# Altium PCB PCB.PcbDoc
Units mm, origin at the board's own origin, x right, y up, seen from the top; angles counter-clockwise.
Board outline 26 x 26 mm, 4 copper layers (Top Layer, GND, Power, Bottom Layer), stack 1.586 mm thick; 44 components, 28 nets, 221 pads, 240 vias.
Unrouted connection lines stored in the file: 4.
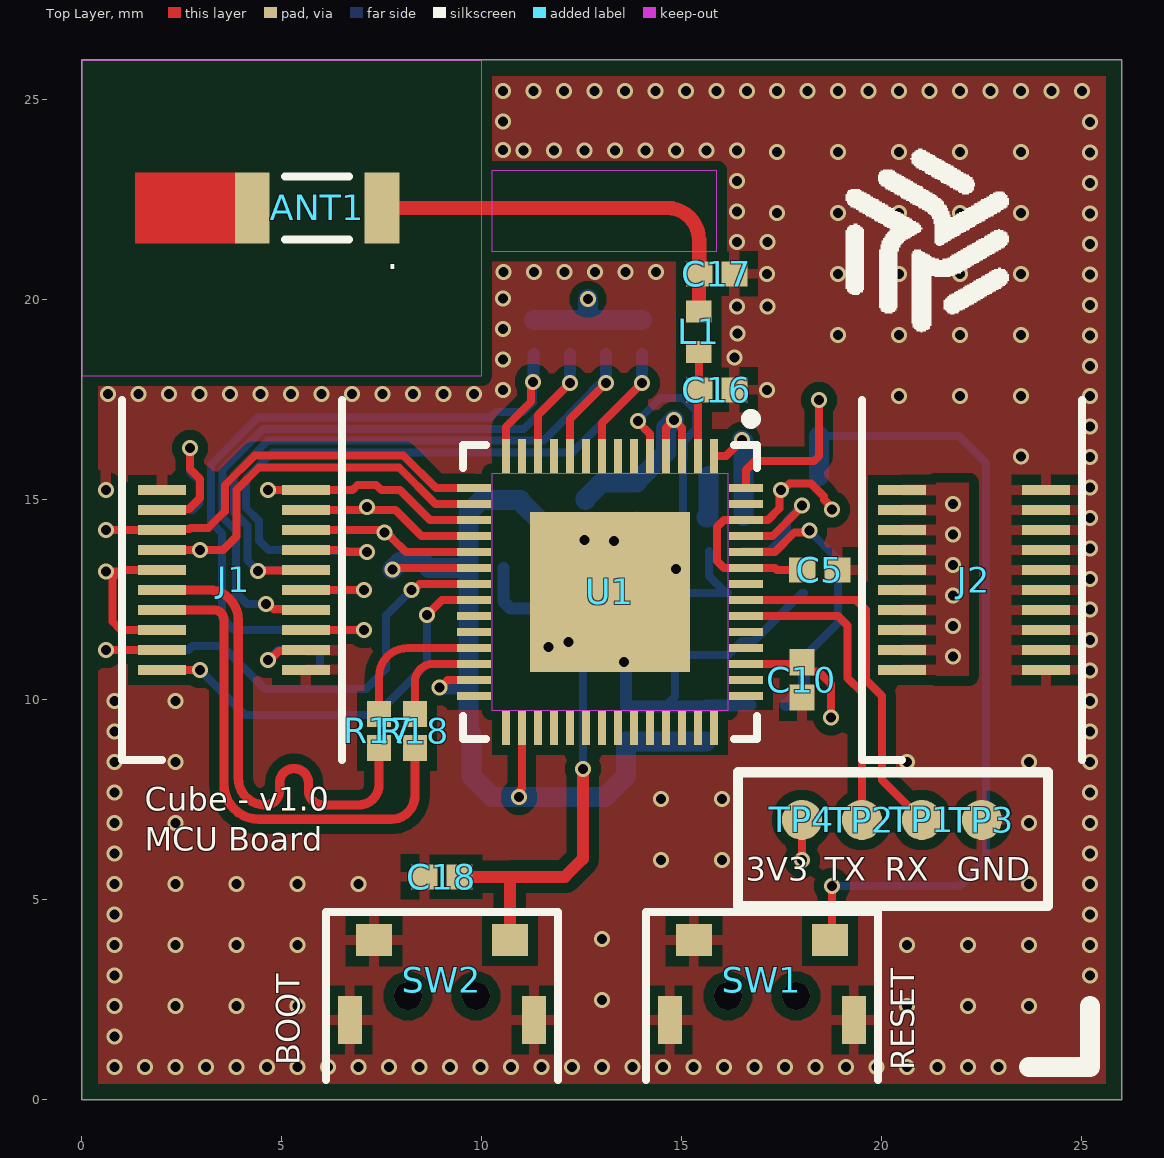
[diagram p0: Top Layer view]
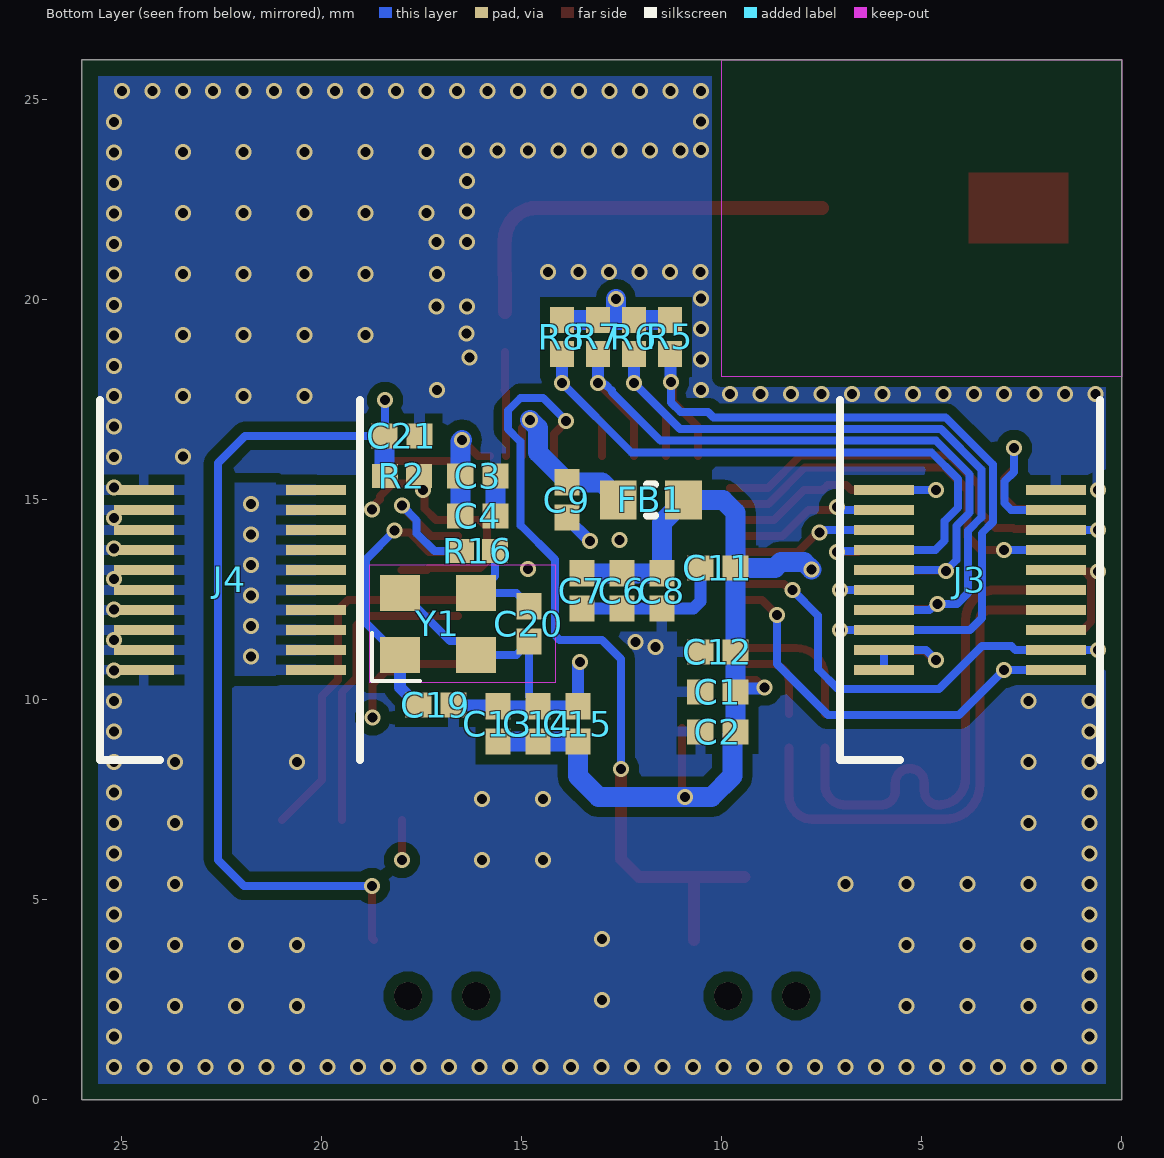
[diagram p1: Bottom Layer view, seen from below]
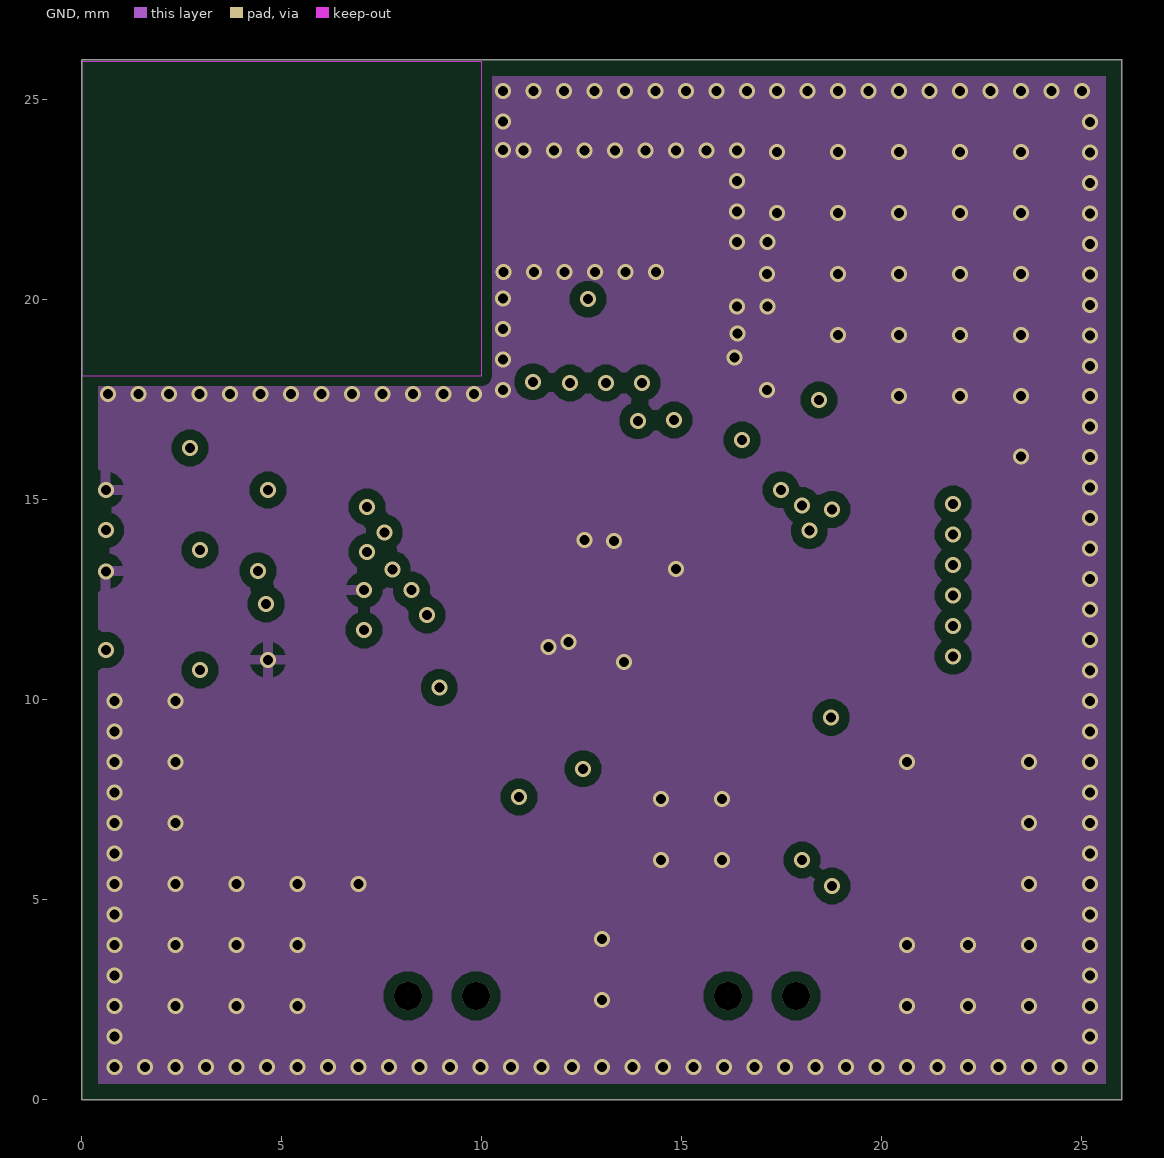
[diagram p2: GND]
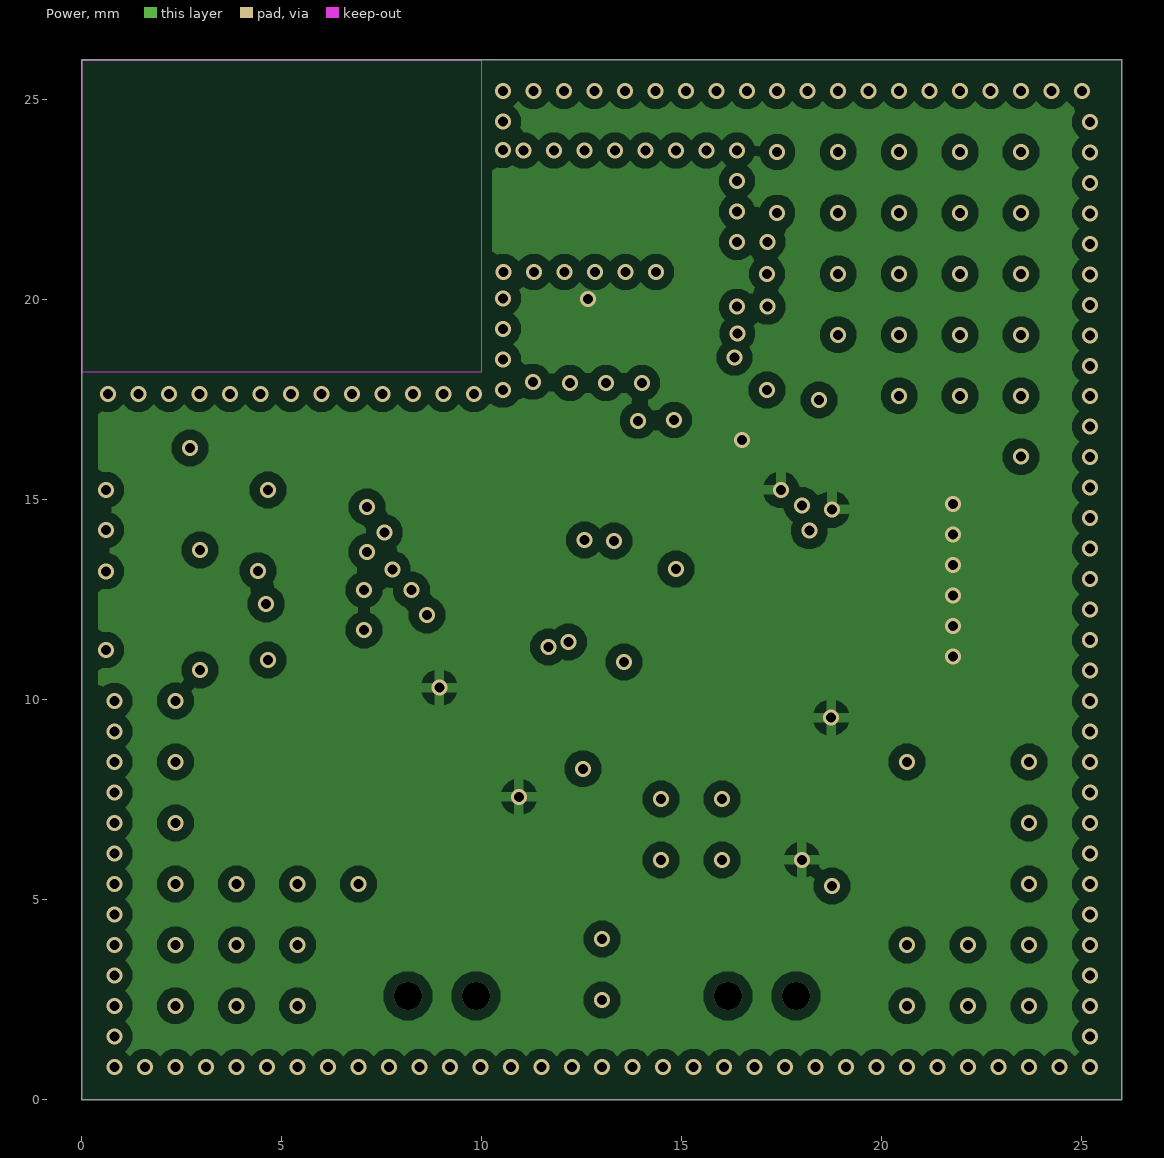
[diagram p3: Power]

## Layer stack, top to bottom
Top Solder: solder mask 0.0102, Solder Resist, Dk 3.5
Top Layer: signal copper 0.035
Dielectric 2: prepreg 0.2104, PP-006, Dk 4.6
GND: signal copper 0.0152
Dielectric 1: core 1.065, Core-025, Dk 4.6
Power: signal copper 0.0152
Dielectric 3: prepreg 0.2104, PP-006, Dk 4.6
Bottom Layer: signal copper 0.035
Bottom Solder: solder mask 0.0102, Solder Resist, Dk 3.5

## Board outline
0,0 0,26 26,26 26,0

## Design rules (kind name [scope] priority, off if disabled: settings)
BoardOutlineClearance [All] p1: gap=0.4 ignorepadtopadclearanceinfootprint=FALSE
Clearance [All] p1: gap=0.254 ignorepadtopadclearanceinfootprint=FALSE except(0: Arc-Hole Track-Hole SMDPad-Hole THPad-Hole Via-Hole Fill-Hole Poly-Hole Region-Hole Text-Hole; 0.09: Arc-Arc Arc-Track Track-Track; 0.127: SMDPad-SMDPad; 0.2: Arc-SMDPad Track-SMDPad; 0.33: Arc-THPad Track-THPad; 0.5: THPad-THPad)
DiffPairsRouting DiffPairsRouting_USB [InDifferentialPairClass('USB')] p1: maxlimit=0.254 minlimit=0.127 mostfreqgap=0.254 toplayer_maxgap=0.127 toplayer_prefgap=0.127 toplayer_minwidth=0.232 toplayer_maxwidth=0.232 toplayer_prefwidth=0.232 bottomlayer_maxgap=0.127 bottomlayer_prefgap=0.127 bottomlayer_minwidth=0.232 bottomlayer_maxwidth=0.232 bottomlayer_prefwidth=0.232 impedanceprofiledriven=TRUE impedanceprofileid={58094A1F-92C8-4BD8-B7AC-1BFEEA8435DD} impedanceprofilevalue=90.000000 maxuncoupledlength=12.7
DiffPairsRouting [All] p2: maxlimit=0.254 minlimit=0.254 mostfreqgap=0.254 toplayer_minwidth=0.381 toplayer_maxwidth=0.381 toplayer_prefwidth=0.381 midlayer1_minwidth=0.381 midlayer1_maxwidth=0.381 midlayer1_prefwidth=0.381 midlayer2_minwidth=0.381 midlayer2_maxwidth=0.381 midlayer2_prefwidth=0.381 bottomlayer_minwidth=0.381 bottomlayer_maxwidth=0.381 bottomlayer_prefwidth=0.381 maxuncoupledlength=12.7
PolygonConnect [All] p1: connectstyle=Relief reliefconductorwidth=0.254 reliefentries=4 polygonreliefangle="90 Angle" airgapwidth=0.254
RoutingVias [All] p1: holewidth=0.711 width=1.27 viastyle="Through Hole" minholewidth=0.2 minwidth=0.4 maxholewidth=0.711 maxwidth=1.27
SolderMaskExpansion [All] p1: expansion=0.102 istentingtop=FALSE
Width Width_50Ohm [InNetClass('50Ohm')] p1: maxlimit=0.356 minlimit=0.262 preferedwidth=0.356 toplayer_minwidth=0.356 midlayer1_maxwidth=0.262 midlayer1_prefwidth=0.262 midlayer2_maxwidth=0.262 midlayer2_prefwidth=0.262 bottomlayer_minwidth=0.356 impedanceprofiledriven=TRUE impedanceprofileid={D433AC5E-C2AE-4E07-8878-89EC5C964F57} impedanceprofilevalue=50.000000 minimp=50.000000 maximp=50.000000 favimp=50.000000
Width [All] p2: maxlimit=2 minlimit=0.09 preferedwidth=0.254 minimp=50.000000 maximp=50.000000 favimp=50.000000
29 further rules are at their usual default settings.

## Classes and differential pairs
net class 50Ohm: LNA_IN_50
component class "03 MCU": ANT1 C1 C2 C3 C4 C5 C6 C7 C8 C9 C10 C11 C12 C13 C14 C15 C16 C17 C18 C19 C20 C21 FB1 L1 R2 R5 R6 R7 R8 R16 R17 R18 SW1 SW2 TP1 TP2 TP3 TP4 U1 Y1
differential pair class USB: CP_USB ESP_USB USB
component class "02 CONNECTION": J1 J2 J3 J4
differential pair ESP_USB: +ESP_USB_P -ESP_USB_N

## Components (designator, comment, footprint, x,y, rotation, side; value= is the part's Value field where it differs from the comment)
ANT1 "ANT3216LL00R2400A" INDC3216X14N 5.88,22.3 r180 top
C1 "100nF/50V" CAPC1005X06N 10.1,10.2 r180 bottom
C2 "1uF/25V" CAPC1005X06N 10.1,9.2 r180 bottom
C3 "100nF/50V" CAPC1005X06N 16.1,15.6 r0 bottom
C4 "100pF/50V" CAPC1005X06N 16.1,14.6 r0 bottom
C5 "1uF/25V" CAPC1005X06N 18.45,13.25 r180 top
C6 "10uF/6.3V" CAPC1005X06N 12.5,12.725 r90 bottom
C7 "1uF/25V" CAPC1005X06N 13.5,12.725 r90 bottom
C8 "100nF/50V" CAPC1005X06N 11.5,12.725 r90 bottom
C9 "100nF/50V" CAPC1005X06N 13.875,15 r90 bottom
C10 "100nF/50V" CAPC1005X06N 18,10.5 r90 top
C11 "100nF/50V" CAPC1005X06N 10.1,13.3 r180 bottom
C12 "100nF/50V" CAPC1005X06N 10.1,11.2 r180 bottom
C13 "10uF/6.3V" CAPC1005X06N 15.6,9.4 r90 bottom
C14 "10uF/6.3V" CAPC1005X06N 14.6,9.4 r90 bottom
C15 "100nF/50V" CAPC1005X06N 13.6,9.4 r270 bottom
C16 "3.3pF/50V" CAPC1005X06N 15.875,17.75 r180 top
C17 "3.3pF/50V" CAPC1005X06N 15.875,20.65 r180 top
C18 "100nF/50V" CAPC1005X06N 9,5.575 r0 top
C19 "27pF/50V" CAPC1005X06N 17.15,9.875 r0 bottom
C20 "27pF/50V" CAPC1005X06N 14.825,11.9 r90 bottom
C21 "100nF/50V" CAPC1005X06N 18,16.6 r0 bottom
FB1 "1.8A" INDC1608X10N 11.775,15 r0 bottom
J1 "0537480208" 0537480208 2,10.75 r90 top locked
J2 "0537480208" 0537480208 20.5,10.75 r90 top locked
J3 "0529910208" 0529910208 5.55,10.75 r90 bottom locked
J4 "0529910208" 0529910208 24.05,10.75 r90 bottom locked
L1 "2.2nH" INDC1005X05N 15.425,19.2 r90 top
R2 "10K/1%" RESC1005X04N 18,15.6 r0 bottom
R5 "4K7/1%" RESC1005X04N 11.3,19.075 r90 bottom
R6 "4K7/1%" RESC1005X04N 12.2,19.075 r90 bottom
R7 "4K7/1%" RESC1005X04N 13.1,19.075 r90 bottom
R8 "4K7/1%" RESC1005X04N 14,19.075 r90 bottom
R16 "22R/1%" RESC1005X04N 16.1,13.725 r180 bottom
R17 "22R/1%" RESC1005X04N 7.425,9.225 r90 top
R18 "22R/1%" RESC1005X04N 8.325,9.225 r90 top
SW1 "PUSH BUTTON SMD" 1TS003B-1400-3500A-CT 17,2.6 r180 top
SW2 "PUSH BUTTON SMD" 1TS003B-1400-3500A-CT 9,2.6 r180 top
TP1 "Test Point 1mm" TEST_POINT_1mm#1 21,6.975 r90 top
TP2 "Test Point 1mm" TEST_POINT_1mm#2 19.5,7 r90 top
TP3 "Test Point 1mm" TEST_POINT_1mm#2 22.5,7 r90 top
TP4 "Test Point 1mm" TEST_POINT_1mm#2 18,7 r90 top
U1 "ESP32-S2FN4R2" QFN40P700X700X90_HS-57N 13.2,12.7 r270 top
Y1 "40MHz" 7E40000E15UCG 16.15,12.675 r0 bottom

## Footprints (in the part's own frame and the unit in brackets; to place one, negate y for a bottom-side part, rotate by r counter-clockwise, add the part's x,y. Pads: shape width x height; smd on the part's side, far side on the other; paste and mask are expansions set on the pad)
1TS003B-1400-3500A-CT [mm] "1TS003B-1400-3500A-CT"
  rect 0.9x0.8 smd: 1(-1.7,-1.4) 2(1.7,-1.4)
  rect 0.6x1.2 smd: 3(-2.3,0.6) 3(2.3,0.6)
  round 0.7 hole 0.7 mask+0.102: None(-0.85,0) None(0.85,0)
  silkscreen extent -2.9,-2.1 2.9,2.1, body extent -2.36,-1.55 2.34,2.1, height 1.91
7E40000E15UCG [mm] "7E40000E15UCG"
  rect 1x0.9 smd: 1(1.9,1.55) 2(0,1.55) 3(0,0) 4(1.9,0)
  silkscreen extent 1.4,1 2.6,2.2, body extent -0.31,-0.25 2.26,1.8, height 0.55
0529910208 [mm]
  rect 0.25x1.5 smd: 1(0,-3.9) 2(0.5,-3.9) 3(1,-3.9) 4(1.5,-3.9) 5(2,-3.9) 6(2.5,-3.9) 7(3,-3.9) 8(3.5,-3.9) 9(4,-3.9) 10(4.5,-3.9) 11(0,0.4) 12(0.5,0.4) 13(1,0.4) 14(1.5,0.4) 15(2,0.4) 16(2.5,0.4) 17(3,0.4) 18(3.5,0.4) 19(4,0.4) 20(4.5,0.4)
  silkscreen extent -2.25,-5 6.75,1.5, body extent -2.15,-4.45 6.65,0.95, height 2.31
0537480208 [mm]
  rect 0.25x1.2 smd: 1(0,0) 2(0.5,0) 3(1,0) 4(1.5,0) 5(2,0) 6(2.5,0) 7(3,0) 8(3.5,0) 9(4,0) 10(4.5,0) 11(0,-3.6) 12(0.5,-3.6) 13(1,-3.6) 14(1.5,-3.6) 15(2,-3.6) 16(2.5,-3.6) 17(3,-3.6) 18(3.5,-3.6) 19(4,-3.6) 20(4.5,-3.6)
  silkscreen extent -2.25,-4.5 6.75,1, body extent -2.15,-3.9 6.65,0.4, height 2.44
CAPC1005X06N [mm] "Chip Capacitor, 2-Leads, Body 1.00x0.50mm, IPC Medium Density"
  rect 0.66x0.62 smd: 1(-0.44,0) 2(0.44,0)
  body extent -0.53,-0.28 0.53,0.27, height 0.55
INDC1005X05N [mm] "Chip Inductor, 2-Leads, Body 1.00x0.50mm, IPC Medium Density"
  rect 0.55x0.64 smd: 1(-0.505,0) 2(0.505,0)
  body extent -0.5,-0.25 0.5,0.25, height 0.5
INDC1608X10N [mm] "Chip Inductor, 2-Leads, Body 1.65x0.80mm, IPC Medium Density"
  rect 0.92x0.98 smd: 1(-0.815,0) 2(0.815,0)
  silkscreen extent -0.1,-0.39 0.1,0.39, body extent -0.9,-0.48 0.9,0.47, height 0.95
INDC3216X14N [mm] "Chip Inductor, 2-Leads, Body 3.20x1.60mm, IPC Medium Density"
  rect 0.87x1.78 smd: 1(-1.62,0) 2(1.62,0)
  Top Layer region: 2.05,-0.89 4.55,-0.89 4.55,0.89 2.05,0.89
  silkscreen extent -0.8,-0.79 0.8,0.79, body extent -1.68,-0.87 1.68,0.87, height 1.45
QFN40P700X700X90_HS-57N [mm] "QFN, 56-Leads, Body 7.00x7.00mm, Pitch 0.40mm, Thermal Pad 4.00x4.00mm, IPC Medium Density"
  rect 0.85x0.2 smd: 1(-3.4,2.6) 2(-3.4,2.2) 3(-3.4,1.8) 4(-3.4,1.4) 5(-3.4,1) 6(-3.4,0.6) 7(-3.4,0.2) 8(-3.4,-0.2) 9(-3.4,-0.6) 10(-3.4,-1) 11(-3.4,-1.4) 12(-3.4,-1.8) 13(-3.4,-2.2) 14(-3.4,-2.6) 29(3.4,-2.6) 30(3.4,-2.2) 31(3.4,-1.8) 32(3.4,-1.4) 33(3.4,-1) 34(3.4,-0.6) 35(3.4,-0.2) 36(3.4,0.2) 37(3.4,0.6) 38(3.4,1) 39(3.4,1.4) 40(3.4,1.8) 41(3.4,2.2) 42(3.4,2.6)
  rect 0.2x0.85 smd: 15(-2.6,-3.4) 16(-2.2,-3.4) 17(-1.8,-3.4) 18(-1.4,-3.4) 19(-1,-3.4) 20(-0.6,-3.4) 21(-0.2,-3.4) 22(0.2,-3.4) 23(0.6,-3.4) 24(1,-3.4) 25(1.4,-3.4) 26(1.8,-3.4) 27(2.2,-3.4) 28(2.6,-3.4) 43(2.6,3.4) 44(2.2,3.4) 45(1.8,3.4) 46(1.4,3.4) 47(1,3.4) 48(0.6,3.4) 49(0.2,3.4) 50(-0.2,3.4) 51(-0.6,3.4) 52(-1,3.4) 53(-1.4,3.4) 54(-1.8,3.4) 55(-2.2,3.4) 56(-2.6,3.4)
  rect 4x4 smd paste-2539.97: 57(0,0)
  silkscreen extent -4.45,-3.67 3.67,3.68, body extent -3.53,-3.52 3.52,3.53, height 0.9
RESC1005X04N [mm] "Chip Resistor, 2-Leads, Body 1.00x0.50mm, IPC Medium Density"
  rect 0.65x0.6 smd: 1(-0.425,0) 2(0.425,0)
  body extent -0.55,-0.3 0.55,0.3, height 0.4
TEST_POINT_1mm#1 [mm]
  round 1 smd: 1(0.025,0)
TEST_POINT_1mm#2 [mm]
  round 1 smd: 1(0,0)

## Part data
ANT1: "1206  Antennas ROHS", manufacturer=YAGEO, assembler_number=C293767, datasheet=https://datasheet.lcsc.com/lcsc/1810241140_YAGEO-ANT3216LL00R2400A_C293767.pdf, mfr_part_number=ANT3216LL00R2400A
C1 C3 C8 C9 C10 C11 C12 C15 C18 C21: library part CL05B104KO5NNNC, "16V 100nF X7R ±10% 0402  Multilayer Ceramic Capacitors MLCC - SMD/SMT ROHS", manufacturer="Samsung Electro-Mechanics", assembler_number=C1525, datasheet=https://datasheet.lcsc.com/lcsc/1810191219_Samsung-Electro-Mechanics-CL05B104KO5NNNC_C1525.pdf, mfr_part_number=CL05B104KO5NNNC
C2 C5 C7: library part CL05A105KA5NQNC, "25V 1uF X5R ±10% 0402  Multilayer Ceramic Capacitors MLCC - SMD/SMT ROHS", manufacturer="Samsung Electro-Mechanics", assembler_number=C52923, datasheet=https://datasheet.lcsc.com/lcsc/1811091611_Samsung-Electro-Mechanics-CL05A105KA5NQNC_C52923.pdf, mfr_part_number=CL05A105KA5NQNC
C4: library part 0402CG101J500NT, "50V 100pF C0G ±5% 0402  Multilayer Ceramic Capacitors MLCC - SMD/SMT ROHS", manufacturer="FH (Guangdong Fenghua Advanced Tech)", assembler_number=C1546, datasheet=https://datasheet.lcsc.com/lcsc/1810151218_FH--Guangdong-Fenghua-Advanced-Tech-0402CG101J500NT_C1546.pdf, mfr_part_number=0402CG101J500NT
C6 C13 C14: library part CL05A106MQ5NUNC, "6.3V 10uF X5R ±20% 0402  Multilayer Ceramic Capacitors MLCC - SMD/SMT ROHS", manufacturer="Samsung Electro-Mechanics", assembler_number=C15525, datasheet=https://datasheet.lcsc.com/lcsc/2208231630_Samsung-Electro-Mechanics-CL05A106MQ5NUNC_C15525.pdf, mfr_part_number=CL05A106MQ5NUNC
C16 C17: library part 0402CG3R3C500NT, "50V 3.3pF C0G ±0.25pF 0402  Multilayer Ceramic Capacitors MLCC - SMD/SMT ROHS", manufacturer="FH (Guangdong Fenghua Advanced Tech)", assembler_number=C1565, datasheet=https://datasheet.lcsc.com/lcsc/1811141710_FH--Guangdong-Fenghua-Advanced-Tech-0402CG3R3C500NT_C1565.pdf, mfr_part_number=0402CG3R3C500NT
C19 C20: library part 0402CG270J500NT, "50V 27pF C0G ±5% 0402  Multilayer Ceramic Capacitors MLCC - SMD/SMT ROHS", manufacturer="FH (Guangdong Fenghua Advanced Tech)", assembler_number=C1557, datasheet=https://datasheet.lcsc.com/lcsc/1811141710_FH--Guangdong-Fenghua-Advanced-Tech-0402CG270J500NT_C1557.pdf, mfr_part_number=0402CG270J500NT
FB1: library part UPZ1608G300-1R8TF, "1.8A 1 60mΩ 30Ω@100MHz ±25% 0603  Ferrite Beads ROHS", manufacturer=Sunlord, assembler_number=C919159, datasheet=https://datasheet.lcsc.com/lcsc/2110100030_Sunlord-UPZ1608G300-1R8TF_C919159.pdf, mfr_part_number=UPZ1608G300-1R8TF
J1 J2 J3 J4: "CONN PLUG 20POS SMD GOLD", manufacturer=MOLEX
  J1 J2: assembler_number=C564063, datasheet=https://datasheet.lcsc.com/lcsc/2206301915_MOLEX-537480208_C564063.pdf, mfr_part_number=0537480208
  J3 J4: datasheet=https://www.molex.com/pdm_docs/sd/529910208_sd.pdf, mfr_part_number=0529910208
L1: library part CLH1005T-2N2S-S, "400mA 2.2nH ±0.3nH 120mΩ 0402  Inductors (SMD) ROHS", manufacturer="Chilisin Elec", assembler_number=C108254, datasheet=https://datasheet.lcsc.com/lcsc/1811141627_Chilisin-Elec-CLH1005T-2N2S-S_C108254.pdf, mfr_part_number=CLH1005T-2N2S-S
R2: library part 0402WGF1002TCE, "62.5mW Thick Film Resistors 50V ±100ppm/℃ ±1% -55℃~+155℃ 10kΩ 0402  Chip Resistor - Surface Mount ROHS", manufacturer="UNI-ROYAL(Uniroyal Elec)", assembler_number=C25744, datasheet=https://datasheet.lcsc.com/lcsc/2206010100_UNI-ROYAL-Uniroyal-Elec-0402WGF1002TCE_C25744.pdf, mfr_part_number=0402WGF1002TCE
R5 R6 R7 R8: library part CR-02FL6---4K7, "62.5mW Thick Film Resistors 50V ±100ppm/℃ ±1% -55℃~+155℃ 4.7kΩ 0402  Chip Resistor - Surface Mount ROHS", manufacturer="Viking Tech", assembler_number=C406732, datasheet=https://datasheet.lcsc.com/lcsc/1912111437_Viking-Tech-CR-02FL6---4K7_C406732.pdf, mfr_part_number=CR-02FL6---4K7
R16 R17 R18: library part 0402WGF220JTCE, "62.5mW Thick Film Resistors 50V ±1% ±200ppm/℃ -55℃~+155℃ 22Ω 0402  Chip Resistor - Surface Mount ROHS", manufacturer="UNI-ROYAL(Uniroyal Elec)", assembler_number=C25092, datasheet=https://datasheet.lcsc.com/lcsc/2205311900_UNI-ROYAL-Uniroyal-Elec-0402WGF220JTCE_C25092.pdf, mfr_part_number=0402WGF220JTCE
SW1 SW2: library part 1TS003B-1400-3500A-CT, "No NO 0.6W J pin 50mA 4.6mm 100MΩ 50000 140gf@±30gf 12V -40℃~+90℃ 1.82mm 3.5mm Black Rectangle button Surface Mount SPST SMD,4.6x1.82x3.5mm  Tactile Switches ROHS", manufacturer="HYP (Hongyuan Precision)", assembler_number=C319392, datasheet=https://datasheet.lcsc.com/lcsc/1811070920_HYP--Hongyuan-Precision-1TS003B-1400-3500A-CT_C319392.pdf, mfr_part_number=1TS003B-1400-3500A-CT
TP1 TP2 TP3 TP4: library part TestPoint
U1: "QFN-56  RF Modules ROHS", manufacturer="Espressif Systems", assembler_number=C2844252, datasheet=https://datasheet.lcsc.com/lcsc/2203261130_Espressif-Systems-ESP32-S2FN4R2_C2844252.pdf, mfr_part_number=ESP32-S2FN4R2
Y1: library part 7E40000E15UCG, "40MHz SMD Crystal Resonator 15pF ±10ppm ±30ppm -40℃~+85℃ SMD2520-4P  Crystals ROHS", manufacturer="SJK(SHENZHEN CRYSTAL TECH)", assembler_number=C524681, datasheet=https://datasheet.lcsc.com/lcsc/2207271530_SJK-SHENZHEN-CRYSTAL-TECH-7E40000E15UCG_C524681.pdf, mfr_part_number=7E40000E15UCG

## Via types
v1: diameter 0.4, hole 0.25, Top Layer to Bottom Layer, tented both sides, 240 vias

## Nets (pads, with @x,y where several pads share a name; then routed paths per layer and width w, separated by ;. In a path a pad name is that pad's centre, name@x,y a point inside that pad or via, vN(x,y) a via of type N, cw(c..) or ccw(c..) an arc to the next point about the centre after c; other vN are vias at no path point)
+3V3: C1.2 C2.2 C3.2 C4.2 C5.2 C6.2 C7.2 C8.2 C10.2 C11.2 C12.2 C13.1 C14.1 C15.2 FB1.1 J2.1 J2.2 J2.3 J2.4 J2.5 J2.6 J2.7 J2.8 J2.9 J2.10 J4.1 J4.2 J4.3 J4.4 J4.5 J4.6 J4.7 J4.8 J4.9 J4.10 R2.1 R5.2 R6.2 R7.2 R8.2 TP4.1 U1.1 U1.20 U1.27 U1.30 U1.45 U1.51 U1.54 | length 44.1
  Top Layer w0.2: v1(7.759,13.264) 7.796,13.3 U1.20 ; v1(8.934,10.308) 8.951,10.308 9.143,10.5 U1.27 ; v1(10.925,7.575) 10.963,7.613 10.963,7.755 11,7.791 U1.30 ; U1.1 16.1,16.1 v1(16.5,16.5) ; U1.45 17.96,10.9 C10.2 18,10.92 18.21,10.71 18.414,10.71 18.73,10.394 v1(18.73,9.558) ; v1(18,6) TP4.1 ; C5.2 17.377,13.25 17.327,13.3 U1.51 16.051,13.3 15.875,13.476 15.875,14.324 16.051,14.5 U1.54 17.149,14.5 17.441,14.791 17.441,15.214 v1(17.479,15.252) 17.533,15.252 17.692,15.411 18.229,15.411 18.554,15.087 18.554,15.014 18.75,14.818 v1(18.75,14.764)
  Bottom Layer w0.3: v1(8.934,10.308) 8.953,10.289 9.571,10.289 C1.2
  Bottom Layer w0.5: v1(7.759,13.264) 7.946,13.45 8.528,13.45 8.678,13.3 C11.2 ; R5.2 R6.2 12.65,19.5 ; v1(12.65,20.018) 12.65,19.5 ; C7.2 C6.2 C8.2 11.5,14.43 10.96,14.97 FB1.1 9.975,15 9.66,14.685 C11.2 ; R8.2 R7.2 12.65,19.5 ; C13.1 C15.2 13.6,8.093 13.082,7.575 v1(10.925,7.575) 10.258,7.575 9.74,8.093 9.74,9.14 9.68,9.2 C2.2 C1.2 C12.2 C11.2 ; v1(16.5,16.5) 16.54,16.46 C3.2 C4.2
  other v1: 21.775,11.09 21.775,11.852 21.775,12.614 21.775,13.376 21.775,14.138 21.775,14.9
+3V3A: C9.2 FB1.2 U1.3 U1.4 | length 5.4
  Top Layer w0.2: U1.4 14.6,16.8 v1(14.8,17) 15,16.8 U1.3
  Bottom Layer w0.5: FB1.2 12.59,15.03 13,15.44 C9.2 13.875,15.46 14.6,16.185 14.6,16.8 v1(14.8,17)
+VBUS: J1.9 J3.9 | length 5.3
  Top Layer w0.2: J1.9 2.025,14.775 2.674,14.775 2.95,15.051 2.95,15.523 2.7,15.773 v1(2.7,16.3)
  Bottom Layer w0.2: J3.9 2.767,14.75 2.936,14.919 2.936,15.464 2.7,15.7 v1(2.7,16.3)
BAT_ALARM: J1.1 J3.1 U1.22 | length 11.5
  Top Layer w0.2: J1.1 v1(2.95,10.75) ; v1(8.625,12.125) 9,12.5 U1.22
  Bottom Layer w0.2: J3.1 v1(2.95,10.75) 4.075,9.625 7.35,9.625 8.625,10.9 v1(8.625,12.125)
CHARGE_DETECT: J1.2 J3.2 U1.21 | length 13.1
  Top Layer w0.2: v1@0.55,11.25 J1.2 ; v1(8.236,12.746) 8.29,12.746 8.444,12.9 U1.21
  Bottom Layer w0.2: v1@0.55,11.25 J3.2 2.667,11.25 2.767,11.35 3.5,11.35 4.575,10.275 7.1,10.275 7.604,10.779 7.604,12.114 v1(8.236,12.746)
  other v1: 0.6,11.25
ESP_IO0: C18.2 SW2.1 U1.5 | length 20.7
  Top Layer w0.2: v1(13.896,16.979) 13.896,16.953 14.2,16.649 U1.5
  Top Layer w0.3: C18.2 10.675,5.575 ; SW2.1 10.7,5.55 ccw(c10.675,5.55) 10.675,5.575 ; v1(12.525,8.279) 12.525,6.025 12.075,5.575 10.675,5.575
  Bottom Layer w0.2: v1(12.525,8.279) 12.525,11.025 13,11.5 14.058,11.5 14.175,11.617 14.175,13.51 15.03,14.365 15.03,16.034 15.04,16.044 15.04,16.457 15.354,16.771 15.354,17.229 15.029,17.554 14.471,17.554 v1(13.896,16.979)
ESP_RST: C21.2 R2.2 SW1.1 U1.56 | length 25.6
  Top Layer w0.2: U1.56 16.6,15.75 16.825,15.975 18.308,15.975 18.425,16.092 v1(18.425,17.5) ; SW1.1 18.75,4.05 v1(18.75,5.35)
  Bottom Layer w0.2: v1(18.425,17.5) 18.425,16.6 C21.2@18.433,16.592 ; C21.2 21.925,16.6 22.6,15.925 22.6,6 21.95,5.35 v1(18.75,5.35)
  Bottom Layer w0.5: R2.2 18.433,15.607 C21.2@18.433,16.592
ESP_RX: TP1.1 U1.49 | length 8.9
  Top Layer w0.2: U1.49 19.35,12.5 19.6,12.25 19.6,10.501 20,10.101 20,8 TP1.1
ESP_TX: TP2.1 U1.48 | length 7.6
  Top Layer w0.2: U1.48 18.9,12.1 19.141,11.859 19.141,10.549 19.5,10.191 TP2.1
ESP_USB_N: J1.5 J3.5 R17.1 | length 12.6
  Top Layer w0.232: J1.5 3.159,12.75 cw(c3.159,12) 3.909,12 3.909,8.041 ccw(c4.575,8.041) 4.465,7.384 ccw(c4.575,8.041) 4.575,7.375 4.582,7.375 ccw(c4.582,7.736) 4.942,7.736 4.942,7.926 cw(c5.303,7.926) 5.303,8.287 cw(c5.303,7.926) 5.664,7.926 5.664,7.736 ccw(c6.024,7.736) 6.024,7.375 6.925,7.375 ccw(c6.925,7.875) 7.04,7.388 ccw(c6.925,7.875) 7.425,7.875 R17.1
ESP_USB_P: J1.4 J3.4 R18.1 | length 12.6
  Top Layer w0.232: J1.4 3.3,12.25 cw(c3.3,12) 3.55,12 3.55,7.892 ccw(c4.426,7.892) 4.426,7.016 7.733,7.016 ccw(c7.733,7.607) 8.325,7.607 R18.1
GND: C1.1 C2.1 C3.1 C4.1 C5.1 C6.1 C7.1 C8.1 C9.1 C10.1 C11.1 C12.1 C13.2 C14.2 C15.1 C16.1 C17.1 C18.1 C19.1 C20.1 C21.1 J1.3 J1.6 J1.10 J1.11 J1.12 J1.15 J2.11 J2.12 J2.13 J2.14 J2.15 J2.16 J2.17 J2.18 J2.19 J2.20 J3.3 J3.6 J3.10 J3.11 J3.12 J3.15 J4.11 J4.12 J4.13 J4.14 J4.15 J4.16 J4.17 J4.18 J4.19 J4.20 SW1.2 SW1.3 SW2.2 SW2.3 TP3.1 U1.57 Y1.2 Y1.4 | length 25.3
  Top Layer w0.2: v1(0.6,13.216) 0.941,13.216 ; J1.6@1.975,13.225 J1.6 0.975,13.25 0.941,13.216 ; J1.3 0.975,11.75 0.77,11.955 0.77,13.045 0.941,13.216 ; v1(4.65,11) 4.701,11 4.926,11.225 5.575,11.225 J1.12 ; J1.15 v1(7.05,12.75)
  Bottom Layer w0.2: v1(4.65,11) 4.9,11.25 J3.12 J3.11 ; J3.15 v1(7.05,12.75) ; C14.2 14.6,9.86 14.825,10.085 C20.1@14.825,11.44 ; C20.1 C20.1@14.825,11.44 ; Y1.4 18,12.675 16.8,11.475 16.5,11.475 Y1.2 15.14,11.125 C20.1@14.825,11.44
  Bottom Layer w0.3: C11.1 10.54,12.461 10.716,12.285 C8.1 C6.1 C7.1 ; v1(13.3,13.975) 13.31,13.975 13.875,14.54 C9.1 ; v1(13.554,10.946) 13.554,10.919 13.6,10.873 C15.1 C14.2 C13.2 15.618,9.858 16.692,9.858 C19.1
  Bottom Layer w0.5: C4.1@15.62,14.56 ccw(c15.62,14.6) C4.1 C3.1
  other v1: 0.816,0.828 1.578,0.828 2.34,0.828 3.102,0.828 3.864,0.828 4.626,0.828 5.388,0.828 6.15,0.828 6.912,0.828 7.674,0.828 8.436,0.828 9.198,0.828 9.96,0.828 10.722,0.828 11.484,0.828 12.246,0.828 13.008,0.828 13.77,0.828 14.532,0.828 15.294,0.828 16.056,0.828 16.818,0.828 17.58,0.828 18.342,0.828 19.104,0.828 19.866,0.828 20.628,0.828 21.39,0.828 22.152,0.828 22.914,0.828 23.676,0.828 24.438,0.828 25.2,0.828 0.816,1.59 25.2,1.59 0.816,2.352 2.34,2.352 3.864,2.352 5.388,2.352 20.628,2.352 22.152,2.352 23.676,2.352 25.2,2.352 13,2.5 0.816,3.114 25.2,3.114 0.816,3.876 2.34,3.876 3.864,3.876 5.388,3.876 20.628,3.876 22.152,3.876 23.676,3.876 25.2,3.876 13,4.024 0.816,4.638 25.2,4.638 0.816,5.4 2.34,5.4 3.864,5.4 5.388,5.4 6.912,5.4 23.676,5.4 25.2,5.4 14.476,6 16,6 0.816,6.162 25.2,6.162 0.816,6.924 2.34,6.924 23.676,6.924 25.2,6.924 14.476,7.524 16,7.524 0.816,7.686 25.2,7.686 0.816,8.448 2.34,8.448 20.628,8.448 23.676,8.448 25.2,8.448 0.816,9.21 25.2,9.21 0.816,9.972 2.34,9.972 25.2,9.972 25.2,10.734 11.665,11.325 12.165,11.45 25.2,11.496 25.2,12.258 25.2,13.02 14.85,13.275 25.2,13.782 12.565,14 25.2,14.544 0.6,15.25 25.2,15.306 23.479,16.08 25.2,16.068 25.2,16.83 20.431,17.604 21.955,17.604 23.479,17.604 25.2,17.592 0.656,17.65 1.418,17.65 2.18,17.65 2.942,17.65 3.704,17.65 4.466,17.65 5.228,17.65 5.99,17.65 6.752,17.65 7.514,17.65 8.276,17.65 9.038,17.65 9.8,17.65 10.525,17.752 17.125,17.75 25.2,18.354 10.525,18.514 16.315,18.56 18.907,19.128 20.431,19.128 21.955,19.128 23.479,19.128 25.2,19.116 16.385,19.165 10.525,19.276 16.375,19.83 17.137,19.83 25.2,19.878 10.525,20.038 17.125,20.65 18.907,20.652 20.431,20.652 21.955,20.652 23.479,20.652 25.2,20.64 10.54,20.7 11.302,20.7 12.064,20.7 12.826,20.7 13.588,20.7 14.35,20.7 25.2,21.402 16.375,21.45 17.137,21.45 17.383,22.176 18.907,22.176 20.431,22.176 21.955,22.176 23.479,22.176 25.2,22.164 16.375,22.212 25.2,22.926 16.375,22.974 17.383,23.7 18.907,23.7 20.431,23.7 21.955,23.7 23.479,23.7 25.2,23.688 11.041,23.736 11.803,23.736 12.565,23.736 13.327,23.736 14.089,23.736 14.851,23.736 15.613,23.736 16.375,23.736 10.525,23.75 10.525,24.462 25.2,24.45 10.525,25.224 11.287,25.224 12.049,25.224 12.811,25.224 13.573,25.224 14.335,25.224 15.097,25.224 15.859,25.224 16.621,25.224 17.383,25.224 18.145,25.224 18.907,25.224 19.669,25.224 20.431,25.224 21.193,25.224 21.955,25.224 22.717,25.224 23.479,25.224 24.241,25.224 25.003,25.224
I2C1_SCL: J1.13 J3.13 R5.1 U1.14 | length 21.1
  Top Layer w0.2: J1.13 v1(7.05,11.75) ; U1.14 10.6,16.827 11.232,17.46 11.232,17.916 v1(11.271,17.954)
  Bottom Layer w0.2: v1(7.05,11.75) J3.13 3.8,11.75 3.5,12.05 3.5,12.714 3.504,12.718 3.504,14.166 3.226,14.444 3.226,15.881 4.405,17.06 10.21,17.06 10.348,17.198 11.031,17.198 11.271,17.438 v1(11.271,17.954)
  Bottom Layer w0.3: v1(11.271,17.954) 11.285,17.969 11.285,18.635 R5.1
I2C1_SDA: J1.14 J3.14 R6.1 U1.12 | length 19
  Top Layer w0.2: v1(4.606,12.4) 4.66,12.4 4.785,12.275 5.575,12.275 J1.14 ; U1.12 11.4,17.125 v1(12.2,17.925)
  Bottom Layer w0.2: J3.14 4.81,12.25 4.66,12.4 4.125,12.4 3.85,12.675 3.85,14.23 3.516,14.564 3.516,15.761 4.525,16.77 11.045,16.77 v1(12.2,17.925)
  Bottom Layer w0.3: v1(12.2,17.925) R6.1
I2C2_SCL: J1.17 J3.17 R8.1 U1.8 | length 20
  Top Layer w0.2: J1.17@5.625,13.725 J1.17 6.55,13.75 6.604,13.696 v1(7.125,13.696) v1@7.096,13.725 ; U1.8 13,16.925 v1(14,17.925)
  Bottom Layer w0.2: J3.17@5.925,13.775 J3.17 ; v1(7.125,13.696) 7.096,13.725 5.975,13.725 J3.17 ; v1(14,17.925) 12.265,16.19 11.465,16.19 4.765,16.19 4.096,15.521 4.096,14.805 4.43,14.471 4.43,13.986 4.666,13.75 J3.17
  Bottom Layer w0.3: v1(14,17.925) R8.1
I2C2_SDA: J1.16 J3.16 R7.1 U1.10 | length 18.6
  Top Layer w0.2: v1(4.404,13.229) 4.414,13.239 5.589,13.239 J1.16 ; U1.10 12.2,17.025 v1(13.1,17.925)
  Bottom Layer w0.2: v1@4.375,13.2 4.425,13.25 J3.16 ; v1(4.404,13.229) 4.14,13.493 4.14,14.351 3.806,14.685 3.806,15.641 4.645,16.48 11.538,16.48 12.754,17.696 12.754,17.73 12.911,17.887 13.062,17.887 v1(13.1,17.925)
  Bottom Layer w0.3: v1(13.1,17.925) R7.1
LED_B: J1.18 J3.18 U1.19 | length 6.1
  Top Layer w0.2: J1.18@5.575,14.275 J1.18 7.44,14.25 7.505,14.185 v1(7.559,14.185) ; v1@7.55,14.175 7.623,14.175 7.934,13.864 7.936,13.864 8.1,13.7 U1.19
  Bottom Layer w0.2: J3.18 7.44,14.25 7.505,14.185 v1(7.559,14.185)
LED_G: J1.19 J3.19 U1.18 | length 5.5
  Top Layer w0.2: J1.19@5.8,14.75 7.838,14.75 8.488,14.1 U1.18
  Bottom Layer w0.2: J3.19 5.954,14.754 7,14.754 7.071,14.825 v1(7.125,14.825)
LED_R: J1.20 J3.20 U1.17 | length 6.9
  Top Layer w0.2: v1(4.65,15.25) J1.20 6.767,15.25 6.896,15.379 7.354,15.379 7.483,15.25 7.95,15.25 8.7,14.5 U1.17
  Bottom Layer w0.2: v1(4.65,15.25) J3.20
LNA_IN: C16.2 L1.1 U1.2 | length 2.6
  Top Layer w0.2: U1.2 15.4,17.715 C16.2 15.425,17.76 L1.1
LNA_IN_50: ANT1.1 C17.2 L1.2 | length 10.2
  Top Layer w0.356: ANT1.1 14.625,22.3 cw(c14.625,21.5) 15.425,21.5 15.435,21.5 C17.2 15.425,20.65 L1.2
NetC20_2: C20.2 R16.2 Y1.3 | length 2.7
  Bottom Layer w0.2: C20.2 14.825,12.36 15.14,12.675 Y1.3@16.1,12.675 ; R16.2 15.675,13.1 Y1.3@16.1,12.675 ; Y1.3 Y1.3@16.1,12.675
NetR17_2: R17.2 U1.25 | length 3.7
  Top Layer w0.2: R17.2 7.425,10.575 cw(c8.15,10.575) 8.15,11.3 U1.25
NetR18_2: R18.2 U1.26 | length 2.5
  Top Layer w0.2: R18.2 8.325,10.45 cw(c8.775,10.45) 8.775,10.9 U1.26
SENSOR_INT1: J1.8 J3.8 U1.15 | length 11.8
  Top Layer w0.2: v1@0.55,14.25 J1.8 2.025,14.275 2.692,14.275 2.721,14.304 3.159,14.304 3.571,14.717 3.571,15.365 4.313,16.106 8.042,16.106 8.849,15.3 U1.15
  Bottom Layer w0.2: v1@0.55,14.25 J3.8
  other v1: 0.6,14.25
SENSOR_INT2: J1.7 J3.7 U1.16 | length 11
  Top Layer w0.2: J1.7 v1(2.95,13.75) 3.525,13.75 3.861,14.086 3.861,15.245 4.433,15.816 7.922,15.816 8.839,14.9 U1.16
  Bottom Layer w0.2: J3.7 v1(2.95,13.75)
XTAL_N: C19.2 U1.52 Y1.1 | length 7
  Top Layer w0.2: U1.52 17.325,13.7 17.816,14.191 18.145,14.191 v1(18.184,14.229)
  Bottom Layer w0.2: Y1.1 18.1,11.125 18.9,11.925 18.9,13.513 v1(18.184,14.229)
  Bottom Layer w0.3: C19.2 17.61,9.875 18.05,10.315 Y1.1
XTAL_P: R16.1 U1.53 | length 3.9
  Top Layer w0.2: U1.53 17.271,14.1 18,14.829 v1(18,14.857)
  Bottom Layer w0.2: R16.1 16.529,13.721 17.187,13.721 17.63,14.164 17.63,14.487 v1(18,14.857)
pads on no net: ANT1.2 SW1.None SW2.None U1.6 U1.7 U1.9 U1.11 U1.13 U1.23 U1.24 U1.28 U1.29 U1.31 U1.32 U1.33 U1.34 U1.35 U1.36 U1.37 U1.38 U1.39 U1.40 U1.41 U1.42 U1.43 U1.44 U1.46 U1.47 U1.50 U1.55

## Polygon pours and split planes (outlines as drawn)
+3V3 on Bottom Layer "+3V3_L04_P004" (solid, pour order 4): 19.4,15.425 19.4,10.6 22.175,10.6 22.175,15.425
GND on Bottom Layer "GND_L04_P005" (solid, pour order 5): 0,26 26,26 26,0 0,0
+3V3 on Power "+3V3_L03_P000" (solid, pour order 0): 0,26 26,26 26,0 0,0
GND on GND "GND_L02_P001" (solid, pour order 1): 0,26 26,26 26,0 0,0
+3V3 on Top Layer "+3V3_L01_P002" (solid, pour order 2): 19.4,15.425 19.4,10.6 22.175,10.6 22.175,15.425
GND on Top Layer "GND_L01_P003" (solid, pour order 3): 0,26 26,26 26,0 0,0

## Keep-outs
Top Layer:
  rectangle: 10.246,9.746 16.154,15.654
  rectangle: 10.25,21.214 15.875,23.225
  region: 10,25.975 0,25.975 0,18.1 10,18.1
GND:
  region: 10,25.95 0,25.95 0,18.1 10,18.1
Power:
  region: 10,25.975 0,25.975 0,18.2 10,18.2
Bottom Layer:
  rectangle: 14.164,10.424 18.804,13.379
  region: 10,26 0,26 0,18.075 10,18.075

## Silkscreen, mask and mechanical layers (free items; w line width, h text height)
Top Overlay:
  drawing of 12 lines, arcs and shapes, not listed
  text "Cube - v1.0 / MCU Board" at 1.571,6.025 h1
  text "3V3" at 16.595,5.275 h1
  text "TX" at 18.57,5.275 h1
  text "RX" at 20.07,5.275 h1
  text "GND" at 21.87,5.275 h1
  text "BOOT" at 5.645,0.871 h1 r90
  text "RESET" at 21.013,0.744 h1 r90
Dimensions:
  the board outline again, w0.254